# Altium PCB EnCoder.PcbDoc
Units mil, origin at the board's own origin, x right, y up, seen from the top; angles counter-clockwise.
Board outline 1968.5 x 1968.5 mil, 2 copper layers (Top Layer, Bottom Layer), stack 21 mil thick; 29 components, 16 nets, 164 pads, 44 vias.
Unrouted connection lines stored in the file: 1.
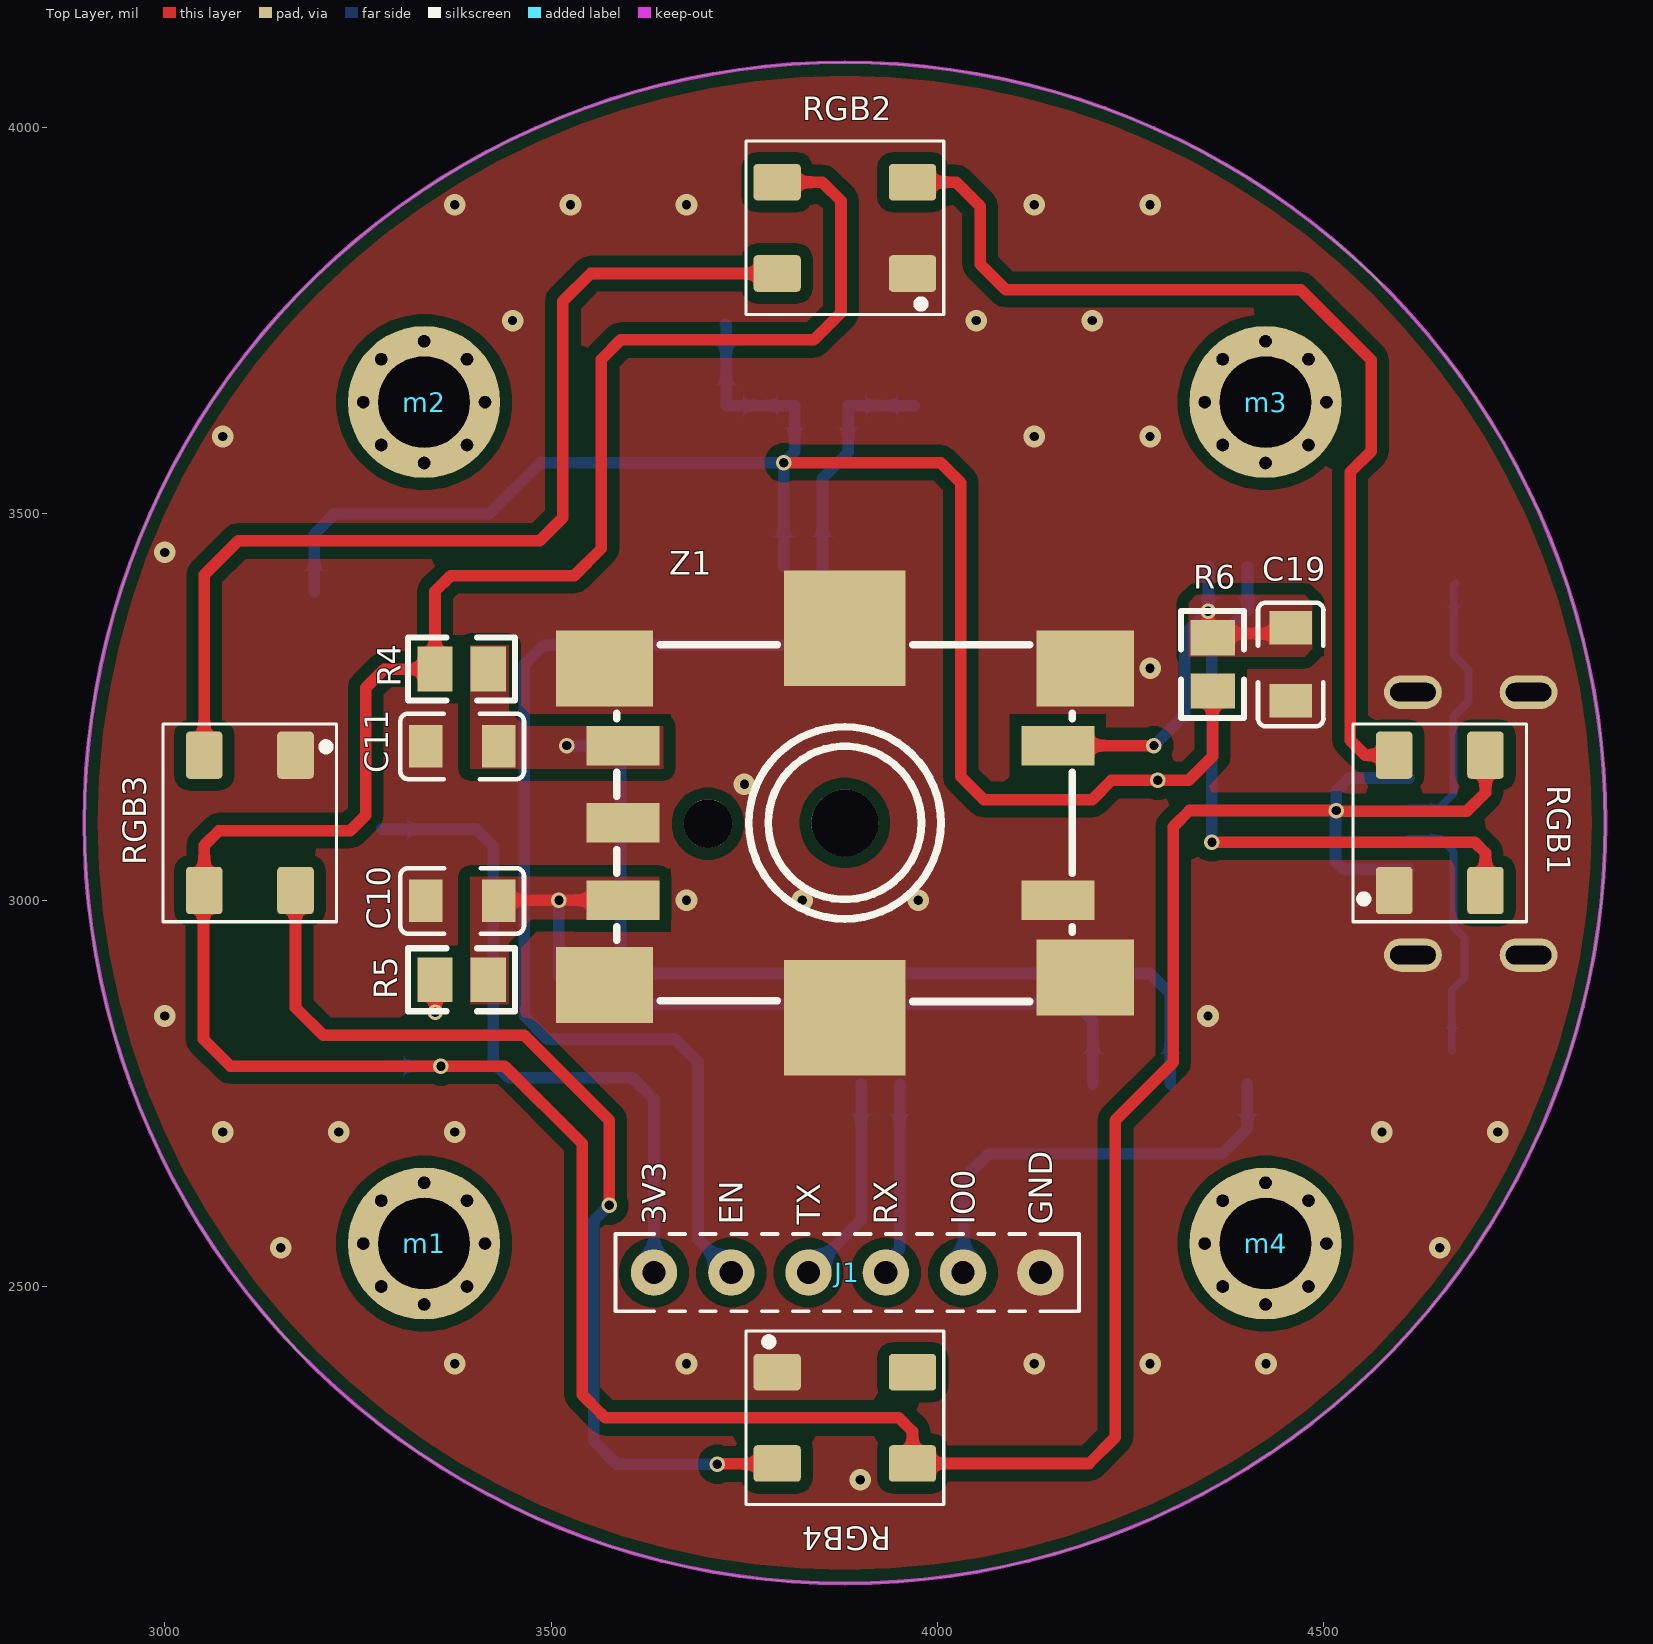
[diagram p0: Top Layer view]
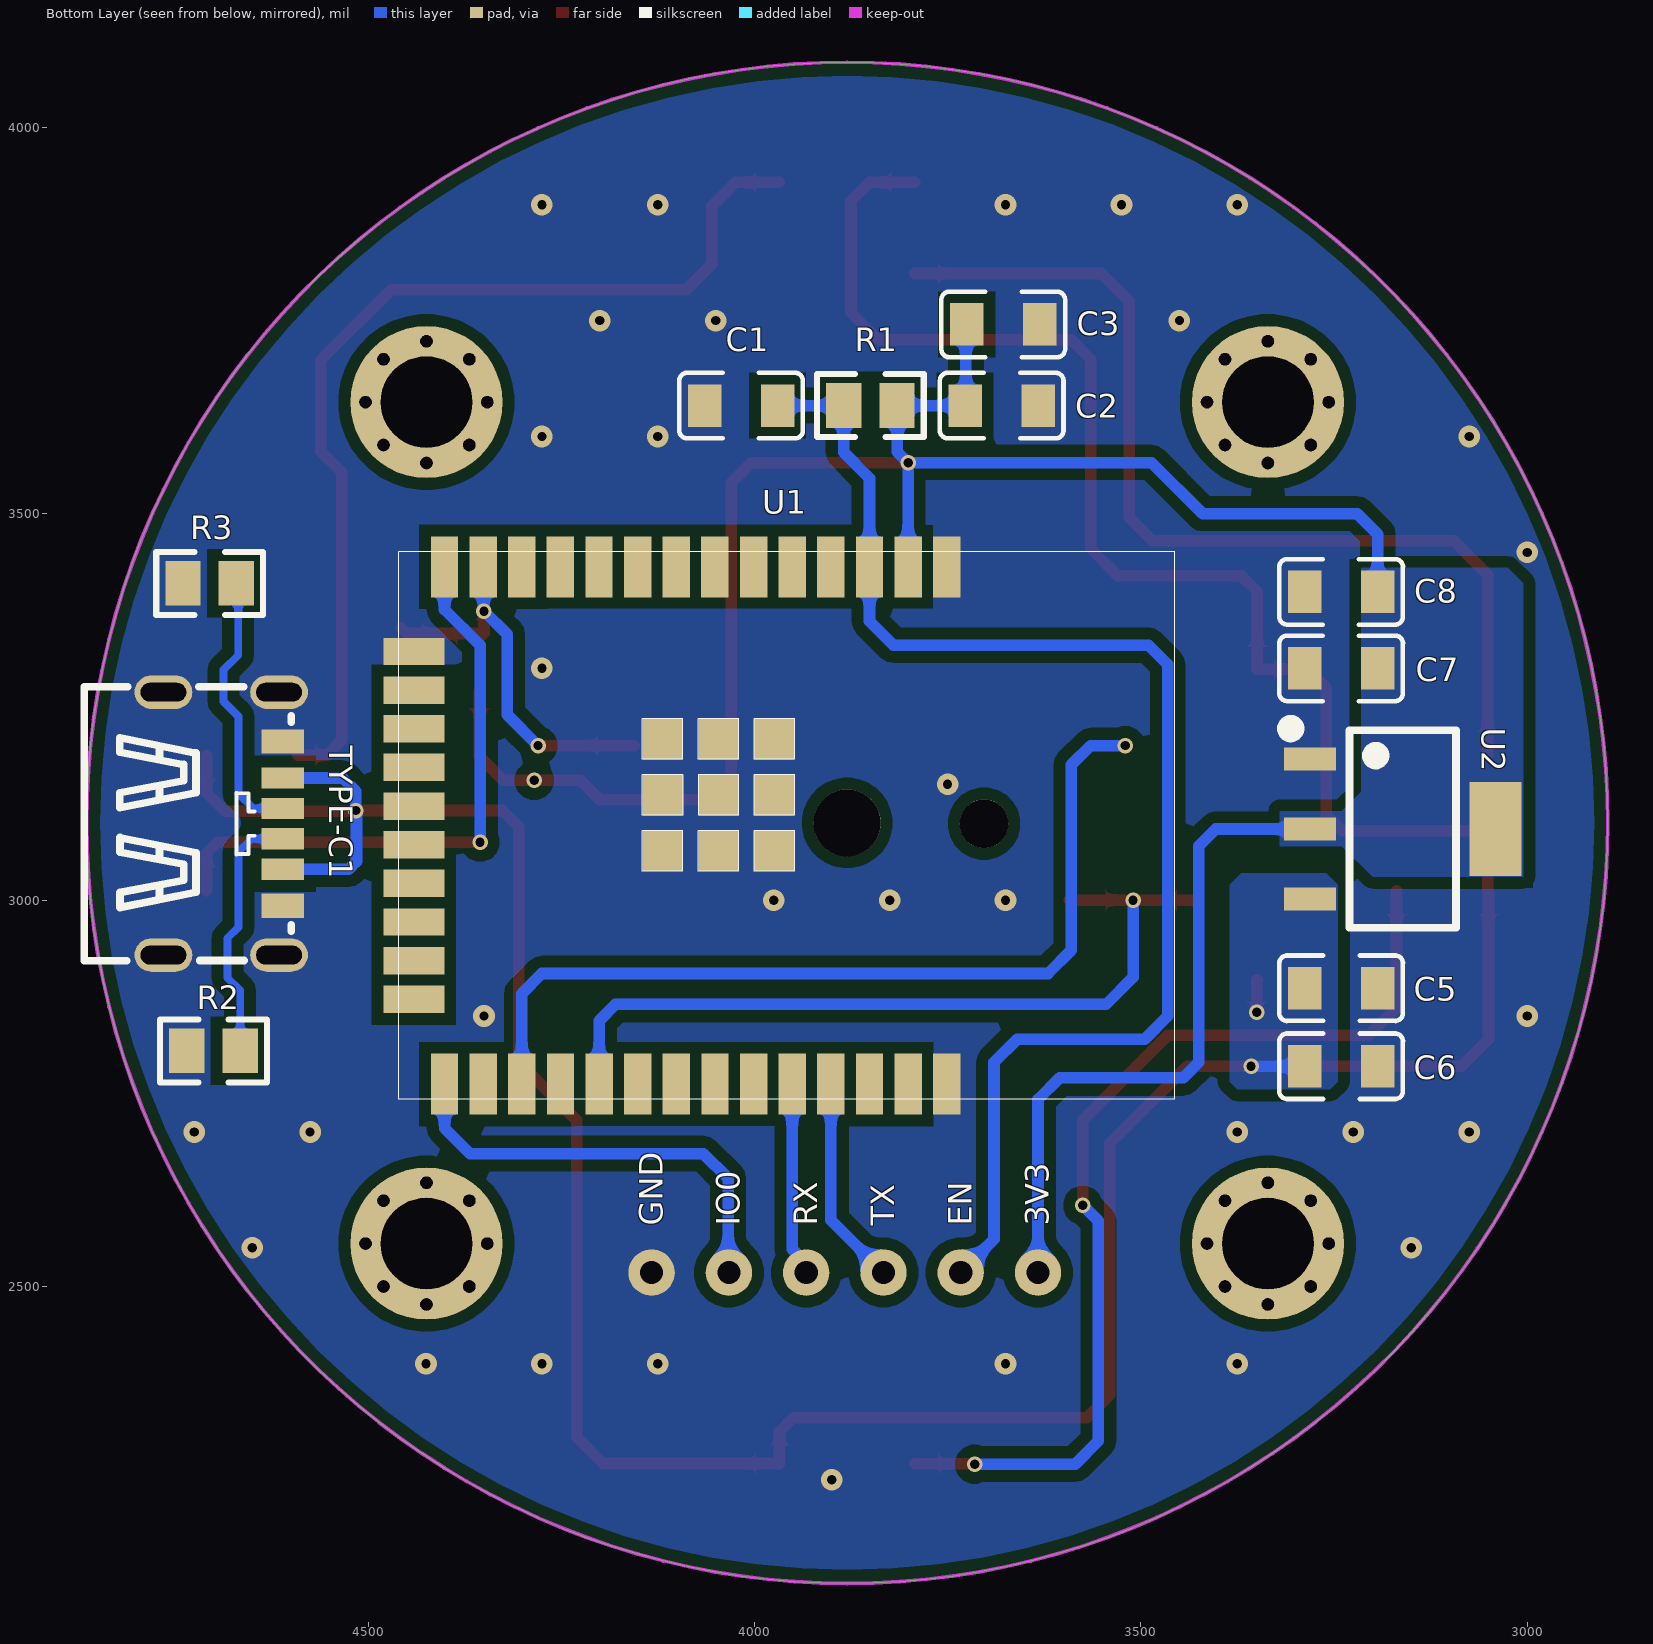
[diagram p1: Bottom Layer view, seen from below]
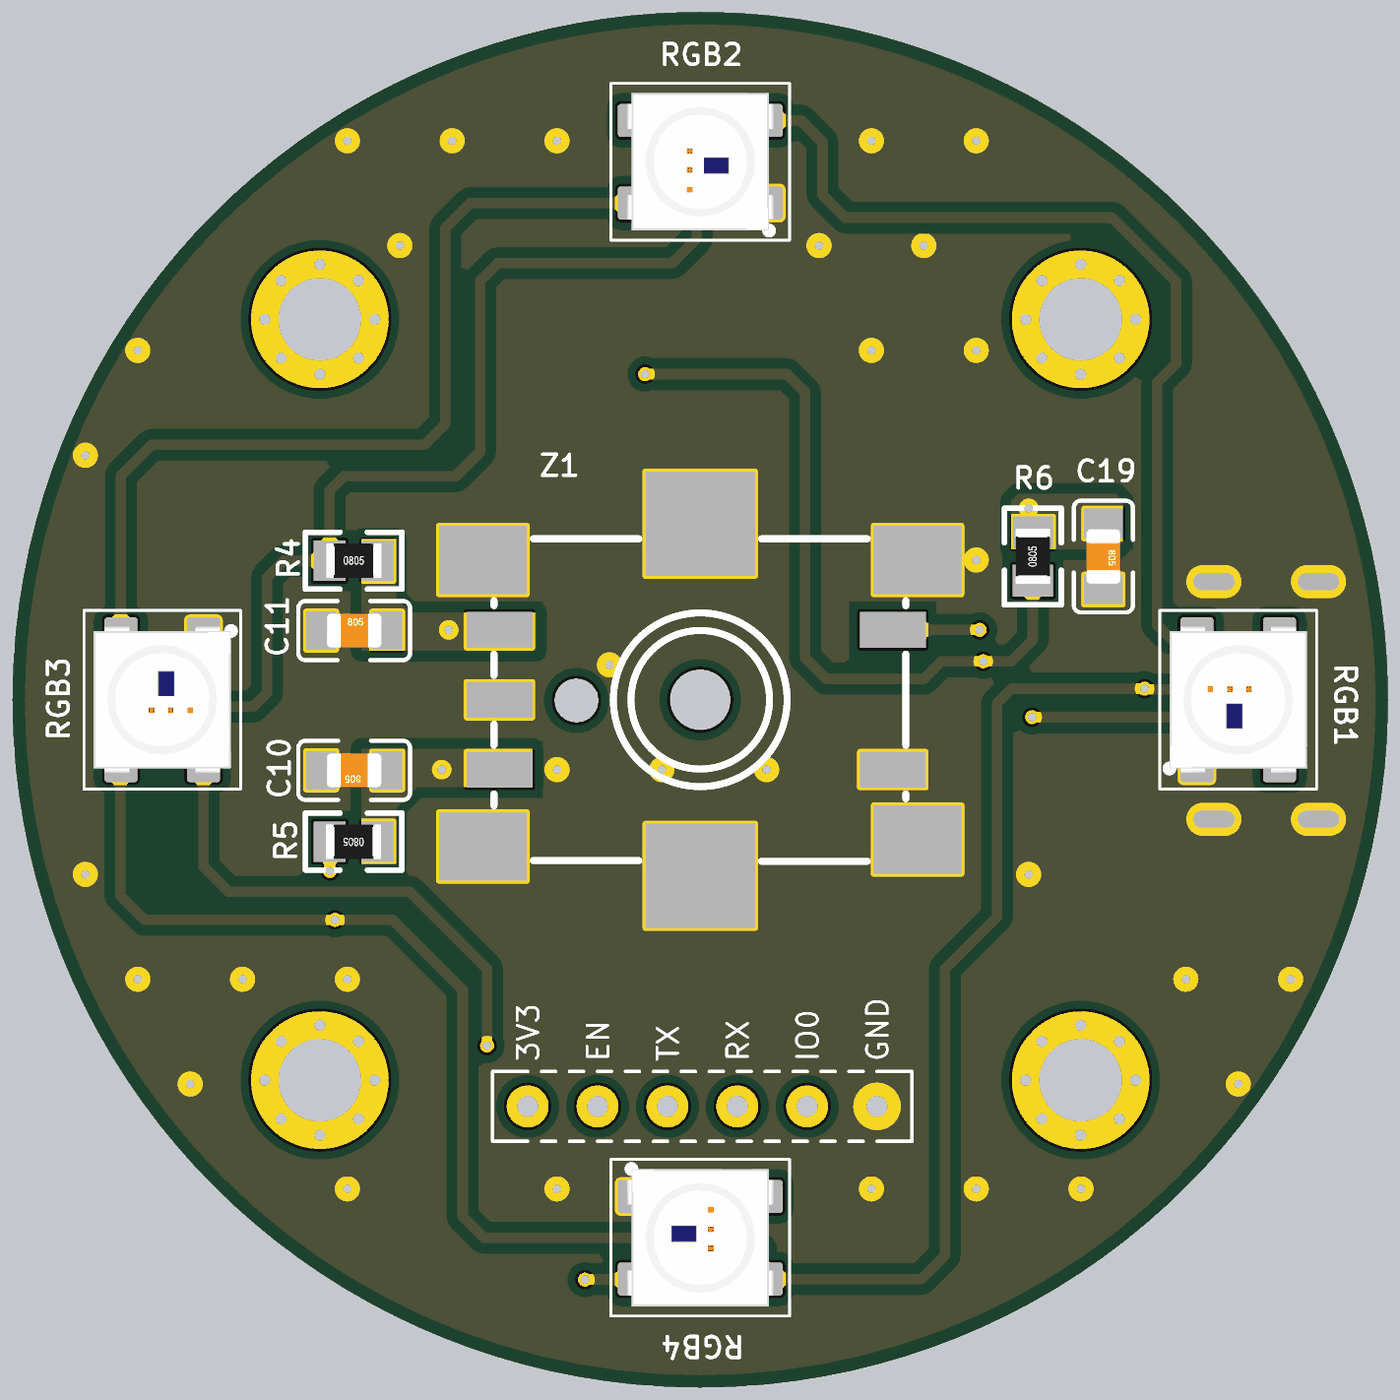
[diagram p2: 3D render of the assembled board from above, using the file's embedded part models]
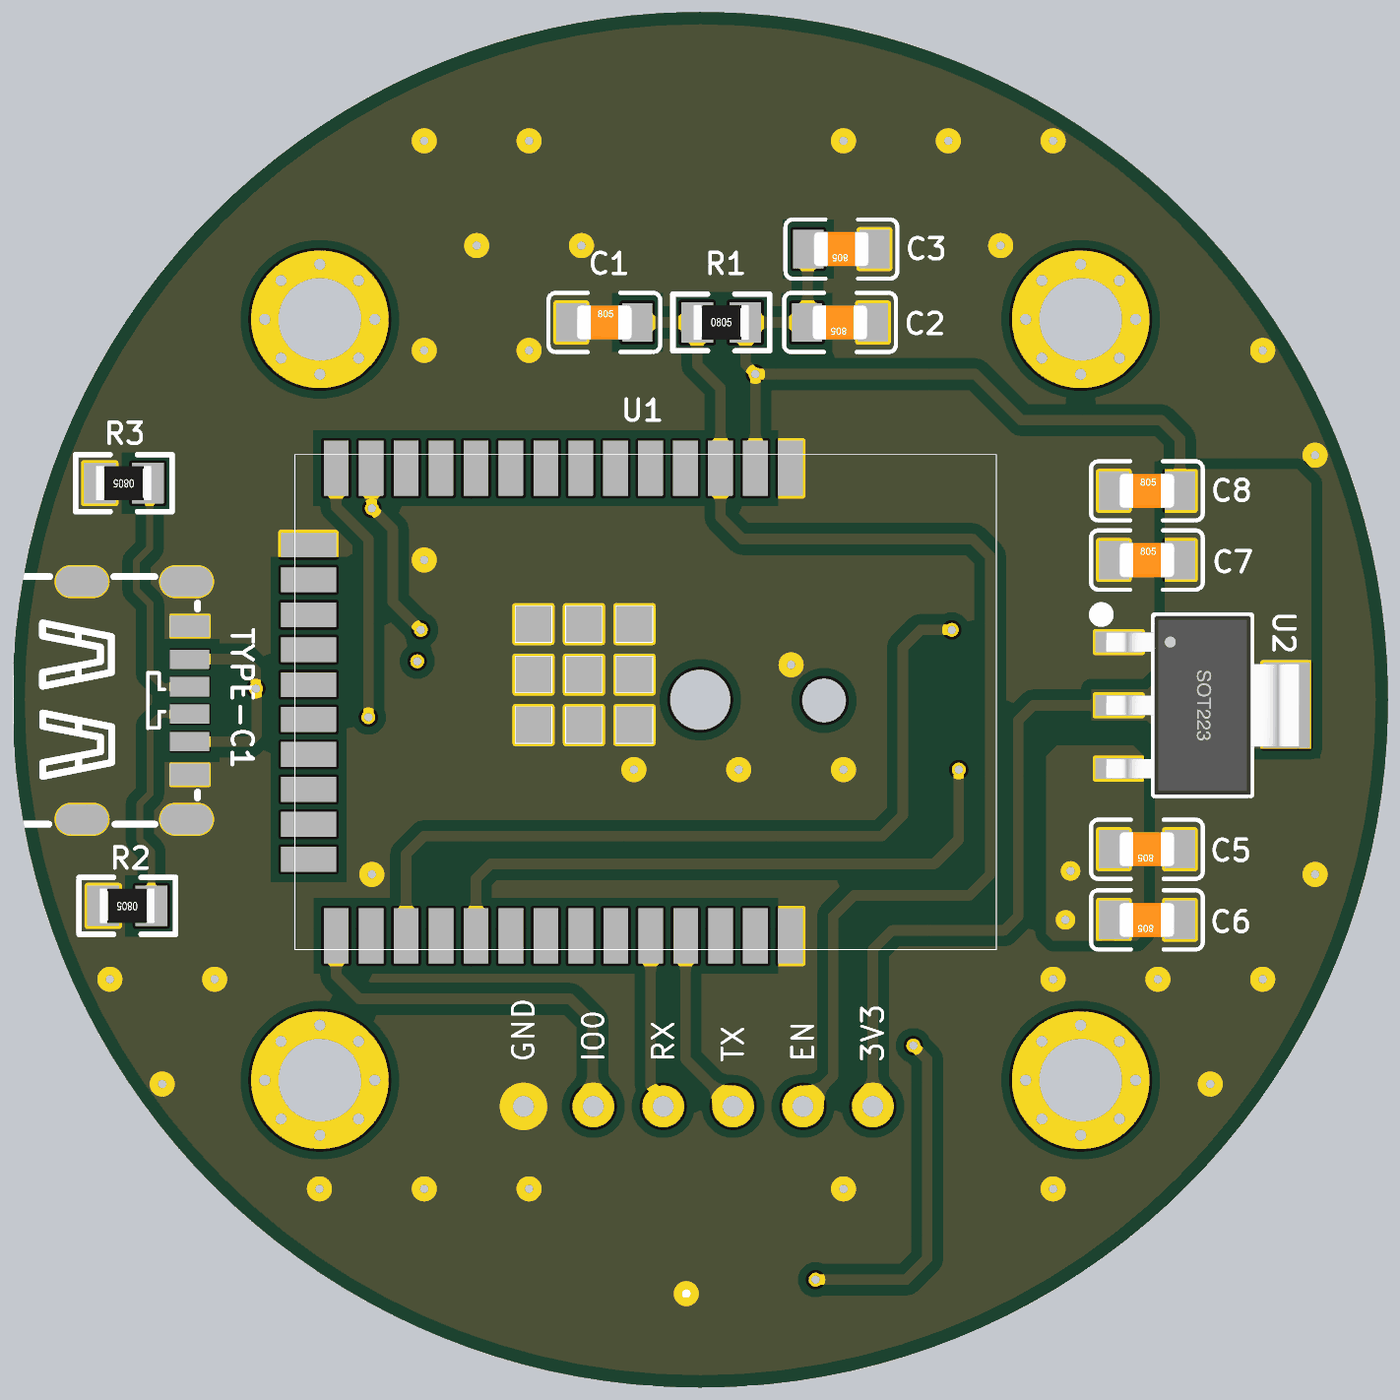
[diagram p3: 3D render of the assembled board from below, using the file's embedded part models]

## Layer stack, top to bottom
Top Solder: solder mask 0.4, Solder Resist, Dk 3.5
Top Layer: signal copper 1.4
Dielectric 2: prepreg 2.8, PP-006, Dk 4.1
Dielectric 1: dielectric 12.6, FR-4, Dk 4.8
Dielectric 3: prepreg 2.8, PP-006, Dk 4.1
Bottom Layer: signal copper 1.4
Bottom Solder: solder mask 0.4, Solder Resist, Dk 3.5

## Board outline
2895.75,3100 ccw(c3880,3100) 3880,2115.75 ccw(c3880,3100) 4864.25,3100 ccw(c3880,3100) 3880,4084.25 ccw(c3880,3100)

## Design rules (kind name [scope] priority, off if disabled: settings)
BoardOutlineClearance [All] p1: gap=15 ignorepadtopadclearanceinfootprint=FALSE except(0: Arc-SplitContinuation Track-SplitContinuation SMDPad-SplitContinuation THPad-SplitContinuation Via-SplitContinuation Fill-SplitContinuation Poly-SplitContinuation Region-SplitContinuation Text-SplitContinuation)
Clearance [All] p1: gap=15 ignorepadtopadclearanceinfootprint=FALSE except(0: Arc-Hole Track-Hole SMDPad-Hole THPad-Hole Via-Hole Fill-Hole Poly-Hole Region-Hole Text-Hole; 10: Arc-Arc Arc-Track Arc-SMDPad Arc-THPad Arc-Via Arc-Text Track-Track Track-SMDPad Track-THPad Track-Via Track-Text SMDPad-SMDPad SMDPad-THPad SMDPad-Via SMDPad-Text THPad-THPad THPad-Via THPad-Text Via-Via Via-Text Text-Text)
PlaneConnect [All] p1: planeconnectstyle=Direct reliefexpansion=20 reliefentries=4 reliefconductorwidth=10 reliefairgap=10
PolygonConnect [All] p1: connectstyle=Direct reliefconductorwidth=10 reliefentries=4 polygonreliefangle="90 Angle" airgapwidth=10
RoutingVias [All] p1: holewidth=28 width=50 viastyle="Through Hole" minholewidth=28 minwidth=50 maxholewidth=28 maxwidth=50
SolderMaskExpansion [All] p1: expansion=4 istentingtop=FALSE
Width [All] p1: maxlimit=100 minlimit=10 preferedwidth=10 minimp=50.000000 maximp=50.000000 favimp=50.000000
29 further rules are at their usual default settings.

## Components (designator, comment, footprint, x,y, rotation, side; value= is the part's Value field where it differs from the comment)
C1 "1uF/25V" "C 0805B" 4017.24,3640 r180 bottom
C2 "0.1uF/25V" "C 0805B" 3680,3640 r0 bottom
C3 "10uF/25V" "C 0805B" 3678,3745 r0 bottom
C5 "10uF/25V" "C 0805B" 3240.71,2886 r0 bottom
C6 "0.1uF/25V" "C 0805B" 3240.71,2785 r0 bottom
C7 "0.1uF/25V" "C 0805B" 3240.71,3300 r180 bottom
C8 "10uF/25V" "C 0805B" 3240.71,3399 r180 bottom
C10 "0.1uF/25V" "C 0805B" 3384.76,2999 r180 top
C11 "0.1uF/25V" "C 0805B" 3384.76,3199 r0 top
C19 "0.1uF/25V" "C 0805B" 4457,3305 r270 top
J1 "Header 6" Header6 3633,2518 r0 top
m1 "M3" M3 3335.53,2555.53 r0 top
m2 "M3" M3 3335.53,3644.47 r0 top
m3 "M3" M3 4424.47,3644.47 r0 top
m4 "M3" M3 4424.47,2555.53 r0 top
R1 "10K/5%" "R 0805" 3850,3640 r180 bottom
R2 "5.1K/5%" "R 0805" 4700,2805 r0 bottom
R3 "5.1K/5%" "R 0805" 4705,3410 r0 bottom
R4 "10K/5%" "R 0805" 3384,3299 r0 top
R5 "10K/5%" "R 0805" 3384,2897 r180 top
R6 "10K/5%" "R 0805" 4356,3305 r90 top
RGB1 "WS2812B" RGBLED5050-4 4650,3100 r270 top
RGB2 "WS2812B" RGBLED5050-4 3880,3870 r0 top
RGB3 "WS2812B" RGBLED5050-4 3110,3100 r90 top
RGB4 "WS2812B" RGBLED5050-4 3880,2330 r180 top
TYPE-C1 "TYPE-C" TYPE-C-6P 4690,3099 r270 bottom
U1 "ESP32-WROOM-32E" ESP32-WROOM-32E 4046.43,3096.65 r270 bottom
U2 "AMS1117" SOT223_L 3161,3092 r270 bottom
Z1 "EC11" EC11-SMD 3880,3100 r90 top

## Footprints (in the part's own frame and the unit in brackets; to place one, negate y for a bottom-side part, rotate by r counter-clockwise, add the part's x,y. Pads: shape width x height; smd on the part's side, far side on the other; paste and mask are expansions set on the pad)
"C 0805B" [mm]
  rect 1.1x1.4 smd: 1(-1.2,0) 2(1.2,0)
  silkscreen extent -2.03,-1.08 2.03,1.08, body extent -1,-0.63 1,0.63, height 0.77
EC11-SMD [mm]
  rect 1.3x2.4 smd: A(2.54,7.3) B(-2.54,7.3) C(0,7.3) D(2.54,-7) E(-2.54,-7)
  rect 3.8x4 smd: EP(-6.4,0) EP(6.4,0)
  rect 2.5x3.2 smd: EP(-5.334,7.9) EP(-5.08,-7.9) EP(5.08,7.9) EP(5.08,-7.9)
  round 1.6 hole 1.6 unplated: ""(-0.027,4.5)
  round 2.2 hole 2.2 unplated: ""(0,0)
  silkscreen extent -5.87,-7.47 5.85,7.5
ESP32-WROOM-32E [mm]
  rect 2x0.9 smd: 1(-8.5,7.502) 2(-8.5,6.232) 3(-8.5,4.962) 4(-8.5,3.692) 5(-8.5,2.422) 6(-8.5,1.152) 7(-8.5,-0.118) 8(-8.5,-1.388) 9(-8.5,-2.658) 10(-8.5,-3.928) 11(-8.5,-5.198) 12(-8.5,-6.468) 13(-8.5,-7.738) 14(-8.5,-9.008) 25(8.5,-9.006) 26(8.5,-7.736) 27(8.5,-6.466) 28(8.5,-5.196) 29(8.5,-3.926) 30(8.5,-2.656) 31(8.5,-1.386) 32(8.5,-0.116) 33(8.5,1.154) 34(8.5,2.424) 35(8.5,3.694) 36(8.5,4.964) 37(8.5,6.234) 38(8.5,7.504)
  rect 0.9x2 smd: 15(-5.717,-10.011) 16(-4.447,-10.011) 17(-3.177,-10.011) 18(-1.907,-10.011) 19(-0.637,-10.011) 20(0.633,-10.011) 21(1.903,-10.011) 22(3.173,-10.011) 23(4.443,-10.011) 24(5.713,-10.011)
  rect 1.33x1.33 smd: 39(-2.835,-1.835) 39(-2.835,0) 39(-2.835,1.836) 39(-1,0) 39(-1,1.836) 39(-1,-1.835) 39(0.836,1.836) 39(0.836,-1.835) 39(0.836,0)
  silkscreen extent -9,-10.51 9,14.99, body extent -9.14,-10.71 9.16,15, height 3
Header6 [mil]
  round 60 hole 30: 1(0,0) 2(100,0) 3(200,0) 4(300,0) 5(400,0) 6(500,0)
  silkscreen extent -50,-50 550,50
M3 [mm]
  round 0.6 hole 0.4 slot 0.405 at 0 deg mask+0.102: 1(-2,0) 1(-1.41,-1.41) 1(-1.41,1.41) 1(0,-2) 1(0,2) 1(1.41,-1.41) 1(1.41,1.41) 1(2,0)
  round 5 hole 3 slot 3.005 at 0 deg mask+0.102: 1(0,0)
"R 0805" [mm]
  rect 1.16x1.47 smd: 1(-0.875,0) 2(0.875,0)
  silkscreen extent -1.76,-1.04 1.76,1.03, body extent -1,-0.63 1,0.63, height 0.49
RGBLED5050-4 [mm] "SOT23, 6-Leads, Body 5.2x5.6mm (max), Pitch 1.50mm, IPC Medium Density"
  rrect20% 1.55x1.2 smd: 1(-2.225,1.5) 2(-2.225,-1.5) 3(2.225,-1.5) 4(2.225,1.5)
  silkscreen extent -3.25,-2.85 3.25,2.85, body extent -2.7,-2.5 2.7,2.5, height 1.58
SOT223_L [mm] "6.4x7x1.6mm(长宽高)"
  rect 0.75x1.7 smd: 1(-2.3,-3.048) 2(0,-3.048) 3(2.3,-3.048)
  rect 3.1x1.7 smd: 2(0,3.048)
  silkscreen extent -3.5,-3.88 3.25,1.75, body extent -3.25,-3.51 3.25,3.51, height 1.65
TYPE-C-6P [mm]
  rect 0.7x1.397 smd mask+0.051: A5(-0.5,2.027) A9(1.5,2.027) B5(0.5,2.027) B9(-1.5,2.027)
  rect 0.8x1.397 smd mask+0.051: A12(2.7,2.027) B12(-2.7,2.027)
  oval 1.1x1.9 hole 0.61 slot 1.5 at 90 deg mask+0.051: EP(-4.32,-1.9) EP(-4.32,1.9) EP(4.32,-1.9) EP(4.32,1.9)
  silkscreen extent -4.5,-4.5 4.5,2.3

## Part data
C1 C2 C3 C5 C6 C7 C8 C10 C11 C19: library part "C 0805", "贴片电容"
J1: "端子"
m1 m2 m3 m4: "M3螺丝"
R1 R2 R3 R4 R5 R6: library part "R 0603", "贴片电阻", BOM_Manufacturer=RALEC, BOM_Manufacturer Part=RTT021202FTH, BOM_Supplier=LCSC, BOM_Supplier Part=C102781, nameAlias="Resistance (Ohms)", spicePre=R, spiceSymbolName=RTT021202FTH
RGB1 RGB2 RGB3 RGB4: "WS2812B灯珠"
TYPE-C1: library part TYPE-C-6
U1: "ESP32模块"
U2: "IC LDO"
Z1: "编码器"

## Via types
v1: diameter 28, hole 12, Top Layer to Bottom Layer, 32 vias
v2: diameter 20, hole 12, Top Layer to Bottom Layer, 12 vias

## Nets (pads, with @x,y where several pads share a name; then routed paths per layer and width w, separated by ;. In a path a pad name is that pad's centre, name@x,y a point inside that pad or via, vN(x,y) a via of type N, cw(c..) or ccw(c..) an arc to the next point about the centre after c; other vN are vias at no path point)
ESP_EN: C1.2 J1.2 R1.1 U1.3 | length 1782.3
  Bottom Layer w15: J1.2 3690,2561 3690,2790 3660,2820 3495,2820 3465,2850 3465,3305 3490,3330 3820,3330 3851.08,3361.08 U1.3 3851.08,3546.08 3884.45,3579.45 R1.1 C1.2
ESP_IO0: J1.5 U1.25 | length 573.3
  Bottom Layer w15: J1.5 4034,2519 4034,2640 4066,2672 4368,2672 4401,2705 U1.25
ESP_IO5: C10.1 R5.1 U1.29 Z1.B | length 1057.2
  Top Layer w15: C10.1 3433,3000 v2(3510,3000) Z1.B
  Bottom Layer w15: v2(3510,3000) 3510,2900 3545,2865 4180,2865 4201,2844 U1.29
ESP_IO12: RGB1.4 U1.14 | length 783.8
  Top Layer w15: v2(4355,3075) 4695,3075 4709.06,3060.94 RGB1.4
  Bottom Layer w15: v2(4355,3075) 4355,3330 4401.08,3376.08 U1.14
ESP_IO14: C19.1 R6.2 U1.13 Z1.D | length 524.4
  Top Layer w15: Z1.D v2(4280,3200) ; v2(4350,3374) 4350,3345.45 4351.08,3344.37 4351.71,3345 4449.76,3345 C19.1
  Bottom Layer w15: v2(4280,3200) 4320,3240 4320,3344 v2(4350,3374) 4350.54,3374.54 4350.54,3430.75 U1.13
ESP_IO16: C11.2 R4.2 U1.27 Z1.A | length 1171.6
  Bottom Layer w15: v2(3520,3200) 3565,3200 3590,3175 3590,2935 3620,2905 4275,2905 4301,2879 U1.27
ESP_RX: J1.4 U1.34 | length 251.5
  Bottom Layer w15: J1.4 3933,2530.18 3951,2548.18 U1.34
ESP_TX: J1.3 U1.35 | length 272.2
  Bottom Layer w15: J1.3 3901,2586 U1.35
GND: C1.1 C2.1 C3.1 C5.1 C6.1 C7.1 C8.1 C10.2 C11.1 C19.2 J1.6 R2.2 R3.2 RGB1.3 RGB2.3 RGB3.3 RGB4.3 TYPE-C1.A12 TYPE-C1.B12 TYPE-C1.EP U1.1 U1.15 U1.38 U1.39 U2.1 Z1.C Z1.E Z1.EP
  other v1: 3900,2250 3375,2400 3675,2400 4125,2400 4275,2400 4425,2400 3150,2550 4650,2550 3075,2700 3225,2700 3375,2700 4575,2700 4725,2700 3000,2850 4350,2850 3675,3000 3825,3000 3975,3000 3750,3150 4275,3300 3000,3450 3075,3600 4125,3600 4275,3600 3450,3750 4050,3750 4200,3750 3375,3900 3525,3900 3675,3900 4125,3900 4275,3900
NetR2_1: R2.1 TYPE-C1.B5 | length 334.6
  Bottom Layer w10: TYPE-C1.B5 4650.68,3079.32 4667.6,3062.4 4667.6,2965 4682,2950.6 4682,2899.6 4665.55,2883.15 R2.1
NetR3_1: R3.1 TYPE-C1.A5 | length 354.6
  Bottom Layer w10: TYPE-C1.A5 4648.69,3118.69 4667.6,3137.6 4667.6,3237.6 4687,3257 4687,3298 4668,3317 4668,3407.45 R3.1
NetRGB1_2: RGB1.2 RGB2.4 | length 1300.8
  Top Layer w15: RGB2.4 4023.94,3929.06 4055,3898 4055,3823 4088,3790 4470,3790 4561,3699 4561,3581 4534,3554 4534,3207 4553.4,3187.6 RGB1.2
NetRGB2_2: RGB2.2 RGB3.4 | length 1300.4
  Top Layer w15: RGB3.4 3050.94,3420.94 3095,3465 3485,3465 3515,3495 3515,3775 3550.94,3810.94 RGB2.2
NetRGB3_2: RGB3.2 RGB4.4 | length 1291.4
  Top Layer w15: RGB3.2 3169.06,2860.94 3205,2825 3465,2825 3575,2715 v2(3575,2605) ; v2(3715,2270) 3715.47,2270.47 3791.93,2270.47 RGB4.4
  Bottom Layer w15: v2(3575,2605) 3555,2585 3555,2300 3585,2270 v2(3715,2270)
VCC3V3: C2.2 C3.2 C7.2 C8.2 J1.1 R1.2 R6.1 U1.2 U2.2 | length 3080.2
  Top Layer w15: v2(3801.08,3566.08) 4003.92,3566.08 4030,3540 4030,3160 4060,3130 4200,3130 4225,3155 v2(4285,3155) 4325,3155 4356,3186 R6.1
  Bottom Layer w15: C8.2 3193.47,3473.47 3220,3500 3420,3500 3486.08,3566.08 v2(3801.08,3566.08) ; U2.2@3281,3092 3403,3092 3425,3070 3425,2790 3445,2770 3605,2770 3633,2742 J1.1 ; C3.2 3726.24,3744 3726.24,3641 C2.2 R1.2 3815,3639.45 3815,3580 v2(3801.08,3566.08) ; U1.2 v2(3801.08,3566.08)
VCC5V: C5.2 C6.2 R4.1 R5.2 RGB1.1 RGB2.1 RGB3.1 RGB4.1 TYPE-C1.A9 TYPE-C1.B9 U2.3 | length 5229.9
  Top Layer w15: R5.2 3350,2896.55 v2(3350,2855) ; RGB2.1 3850.94,3929.06 3875,3905 3875,3760 3840,3725 3590,3725 3565,3700 3565,3455 3530,3420 3370,3420 3349.55,3399.55 R4.1 3284,3299 3260,3275 3260,3110 3240,3090 3070,3090 3050.94,3070.94 RGB3.1 3050,3011.46 3050,2820 3085,2785 v2(3357.31,2785) 3440,2785 3540,2685 3540,2360 3565.01,2334.99 3570,2330 3950,2330 3967.6,2312.4 RGB4.1 4195.94,2270.94 4230,2305 4230,2715 4305,2790 4305,3095 4325.96,3115.96 v2(4515.96,3115.96) 4516.91,3115 4685,3115 4709.06,3139.06 RGB1.1
  Bottom Layer w15: C6.2 v2(3357.31,2785) ; TYPE-C1.A9 4525.05,3039.95 4515,3050 4515,3115 v2(4515.96,3115.96) 4515.96,3140.96 4533.06,3158.06 TYPE-C1.B9
pads on no net: m1.1 m2.1 m3.1 m4.1 RGB4.2 U1.4 U1.5 U1.6 U1.7 U1.8 U1.9 U1.10 U1.11 U1.12 U1.16 U1.17 U1.18 U1.19 U1.20 U1.21 U1.22 U1.23 U1.24 U1.26 U1.28 U1.30 U1.31 U1.32 U1.33 U1.36 U1.37 Z1.

## Polygon pours and split planes (outlines as drawn)
GND on Bottom Layer "GND" (solid, remove dead copper, pour order 6): 2895.75,3100 ccw(c3880,3100) 3880,2115.75 ccw(c3880,3100) 4864.25,3100 ccw(c3880,3100) 3880,4084.25 ccw(c3880,3100)
VCC5V on Bottom Layer "NONET_L-01_P-001" (solid, remove dead copper, pour order 4): 3370,3035 3385,3020 3385,2765 3375,2755 3255,2755 3245,2765 3245,3020 3260,3035
VCC3V3 on Bottom Layer "NONET_L-01_P-001" (solid, remove dead copper, pour order 0): 3215,3430 3215,3140 3240,3115 3320,3115 3320,3070 3240,3070 3200,3030 3005,3030 3005,3410 3025,3430
GND on Top Layer "GND" (solid, remove dead copper, pour order 5): 2895.75,3100 ccw(c3880,3100) 3880,2115.75 ccw(c3880,3100) 4864.25,3100 ccw(c3880,3100) 3880,4084.25 ccw(c3880,3100)
ESP_IO14 on Top Layer "NONET_L-01_P-001" (solid, remove dead copper, pour order 3): 4325,3315 4475,3315 4485,3325 4485,3385 4475,3395 4335,3395 4325,3385
ESP_IO16 on Top Layer "NONET_L-01_P-001" (solid, pour order 2): 3395,3330 3395,3170 3645,3170 3645,3225 3465,3225 3445,3245 3445,3330
ESP_IO5 on Top Layer "NONET_L-01_P-001" (solid, remove dead copper, pour order 1): 3640,2975 3475,2975 3445,2945 3445,2865 3395,2865 3395,3030 3640,3030

## Keep-outs
Keep-Out Layer:
  circle w5: c3880,3100 r984.25

## Silkscreen, mask and mechanical layers (free items; w line width, h text height)
Top Overlay:
  text "3V3" at 3648.06,2579.94 h30 r90
  text "EN" at 3748.06,2579.94 h30 r90
  text "TX" at 3848.06,2579.94 h30 r90
  text "RX" at 3948.06,2579.94 h30 r90
  text "IO0" at 4048.06,2579.94 h30 r90
  text "GND" at 4148.06,2579.94 h30 r90
Bottom Overlay:
  text "3V3" at 3618.94,2578.94 h30 r270
  text "EN" at 3718.94,2578.94 h30 r270
  text "TX" at 3818.94,2578.94 h30 r270
  text "RX" at 3918.94,2578.94 h30 r270
  text "IO0" at 4018.94,2578.94 h30 r270
  text "GND" at 4118.94,2578.94 h30 r270